# Altium PCB power.PcbDoc
Units mm, origin at the board's own origin, x right, y up, seen from the top; angles counter-clockwise.
Board outline 122.6 x 101.6 mm, 4 copper layers (Top Layer, Int1 (GND), Int2 (PWR), Bottom Layer), stack 1.369 mm thick; 55 components, 42 nets, 173 pads, 146 vias.
Unrouted connection lines stored in the file: 3.
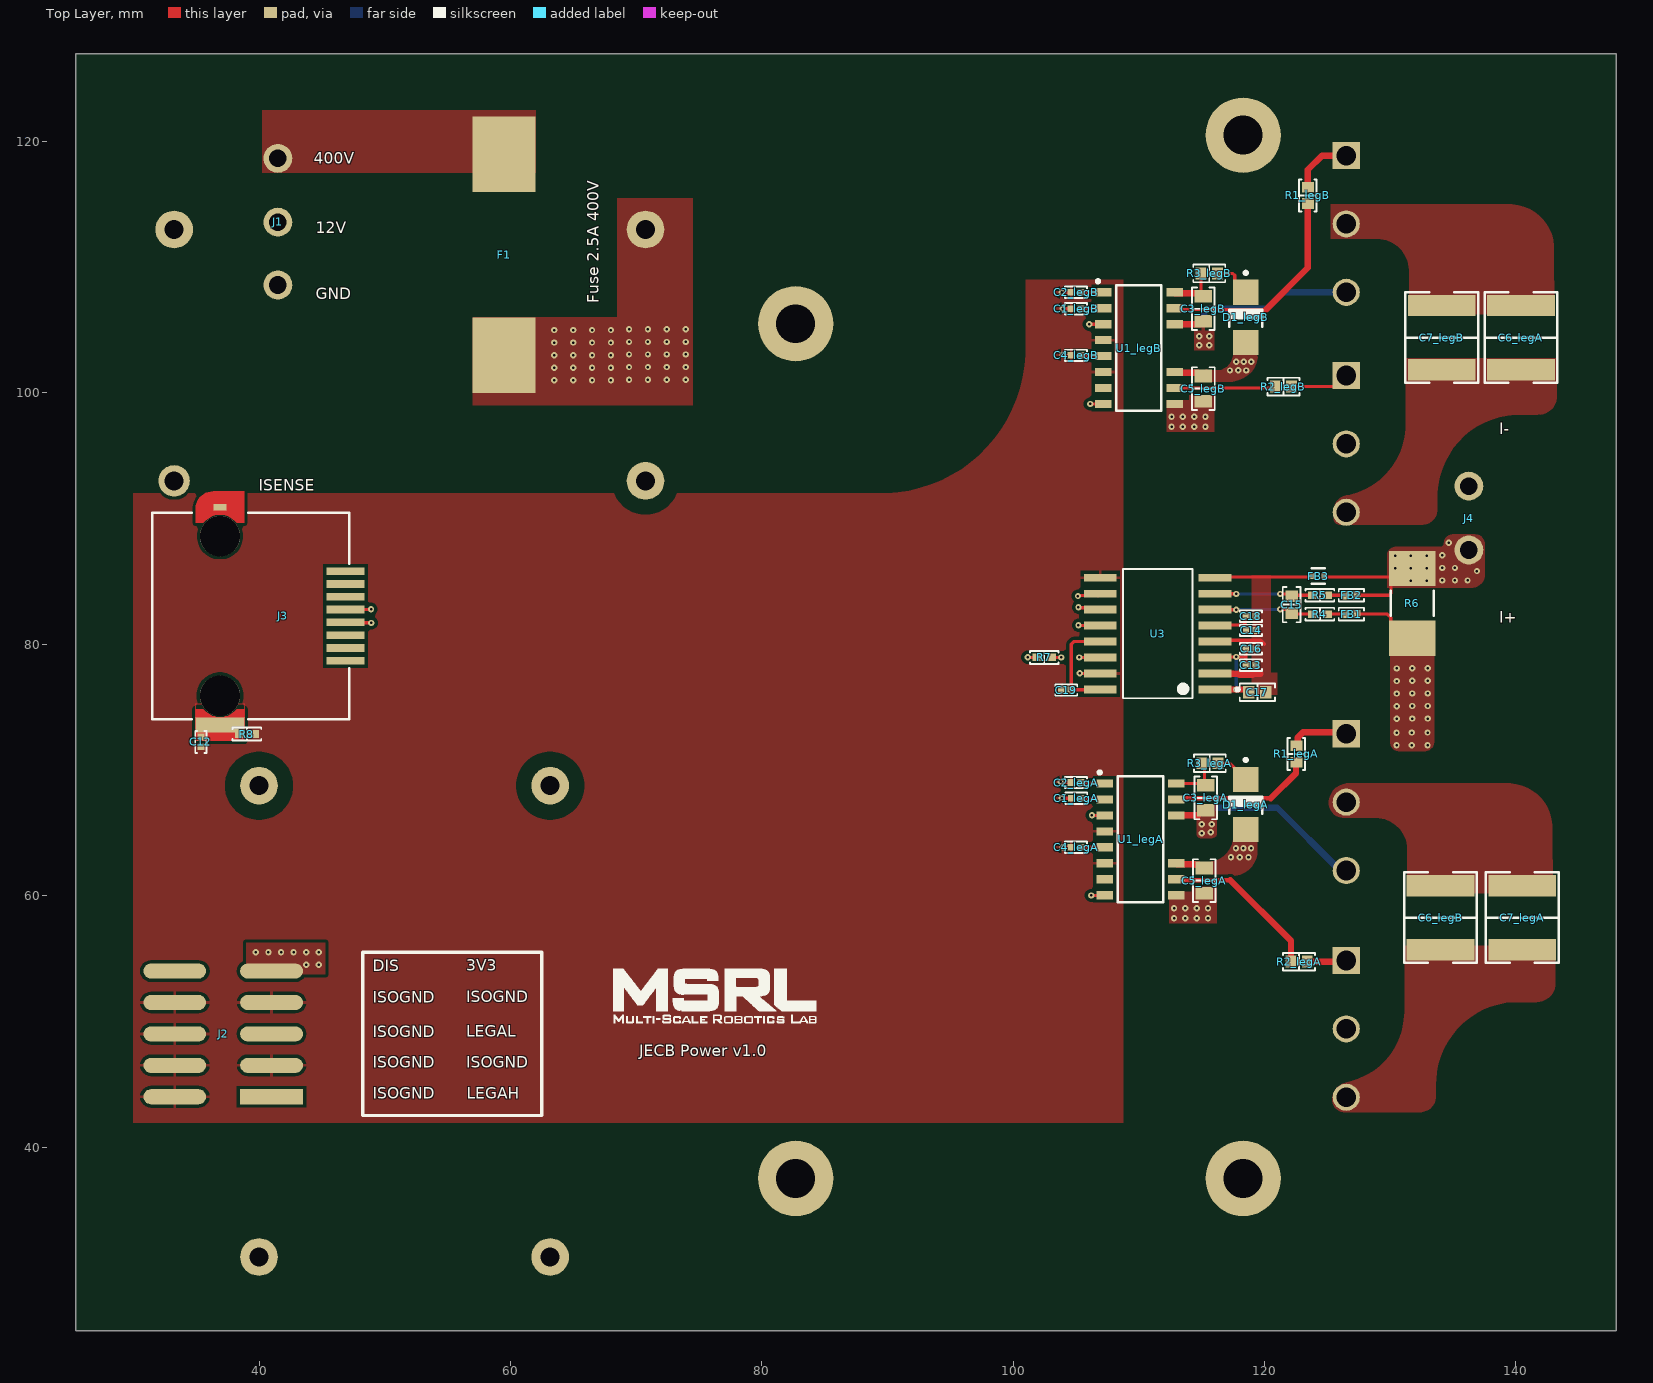
[diagram p0: Top Layer view]
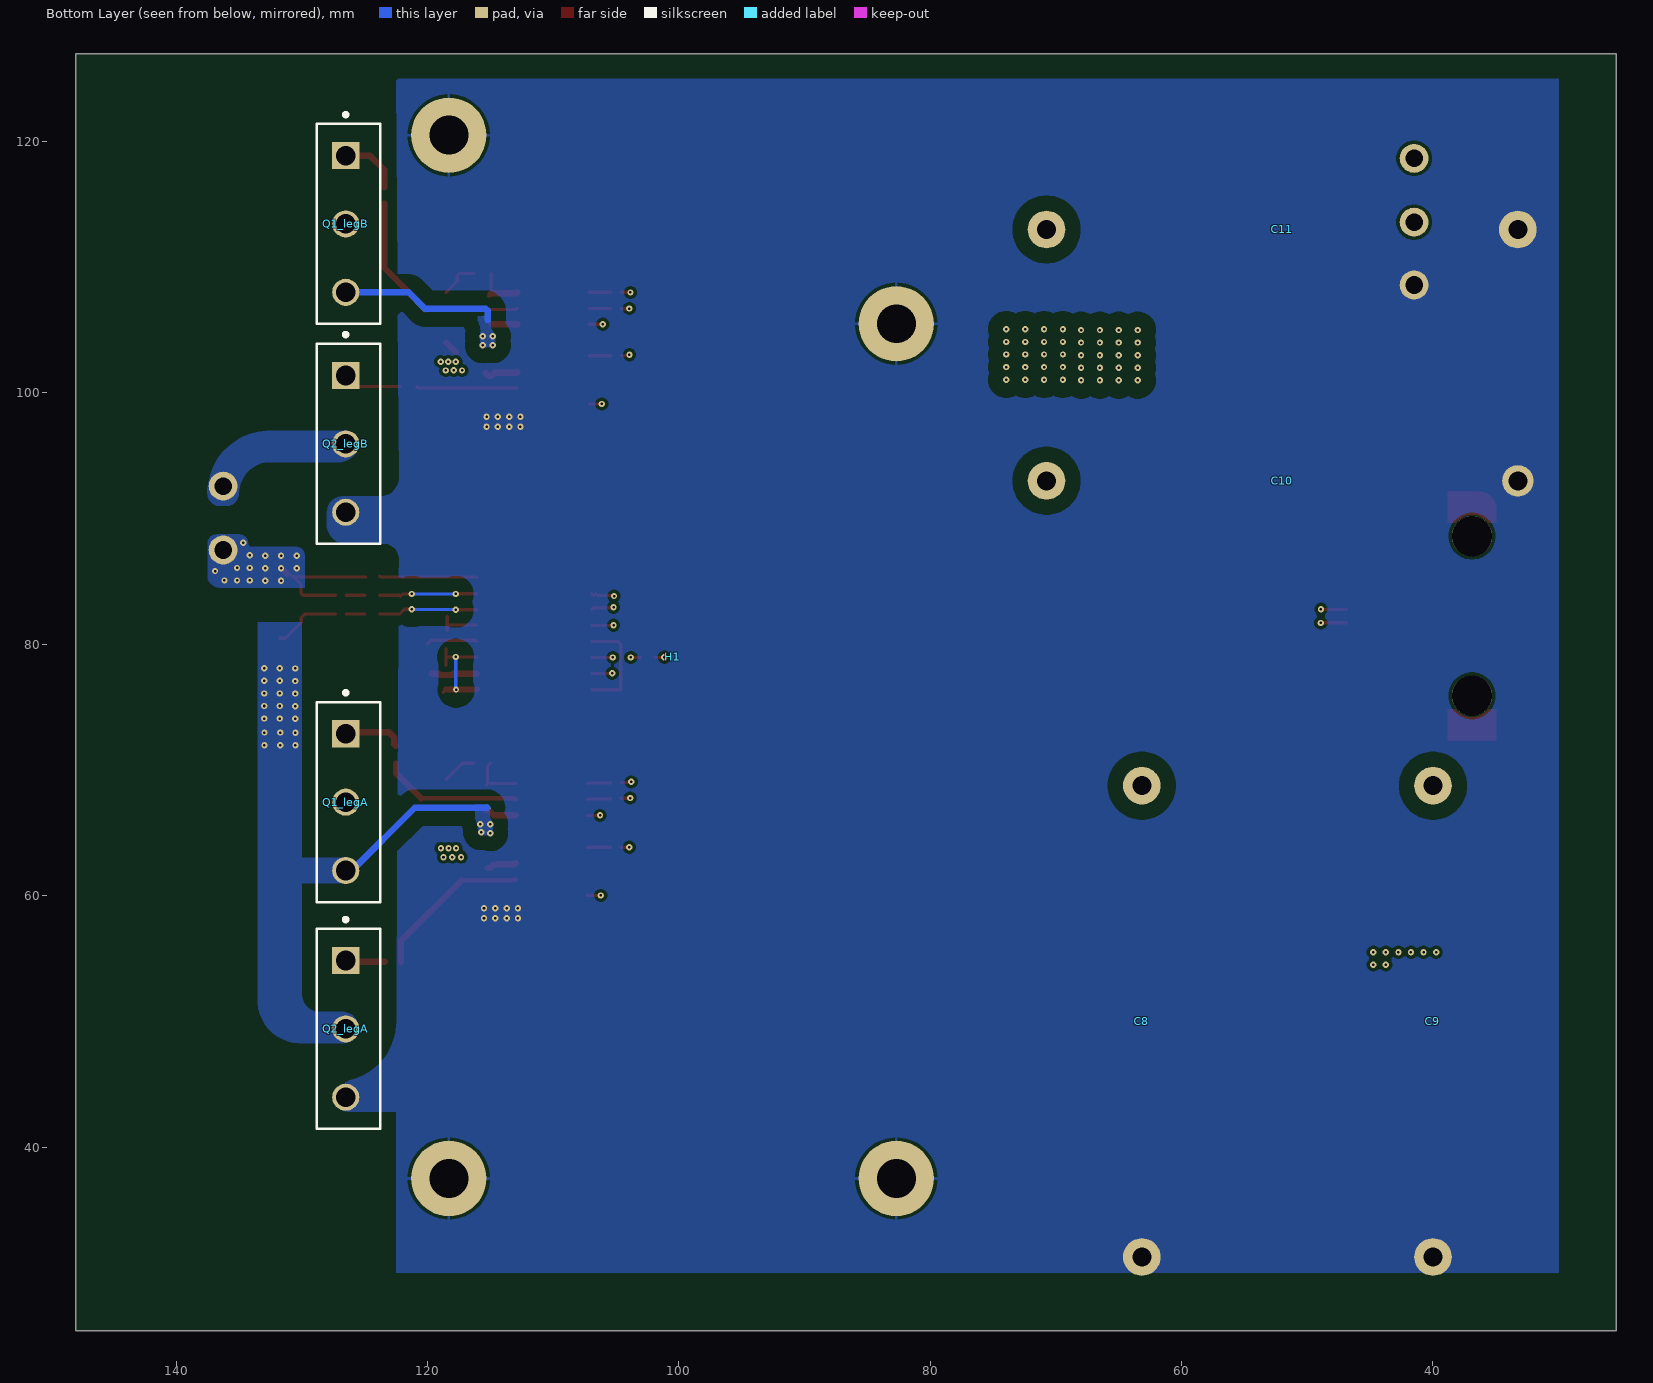
[diagram p1: Bottom Layer view, seen from below]
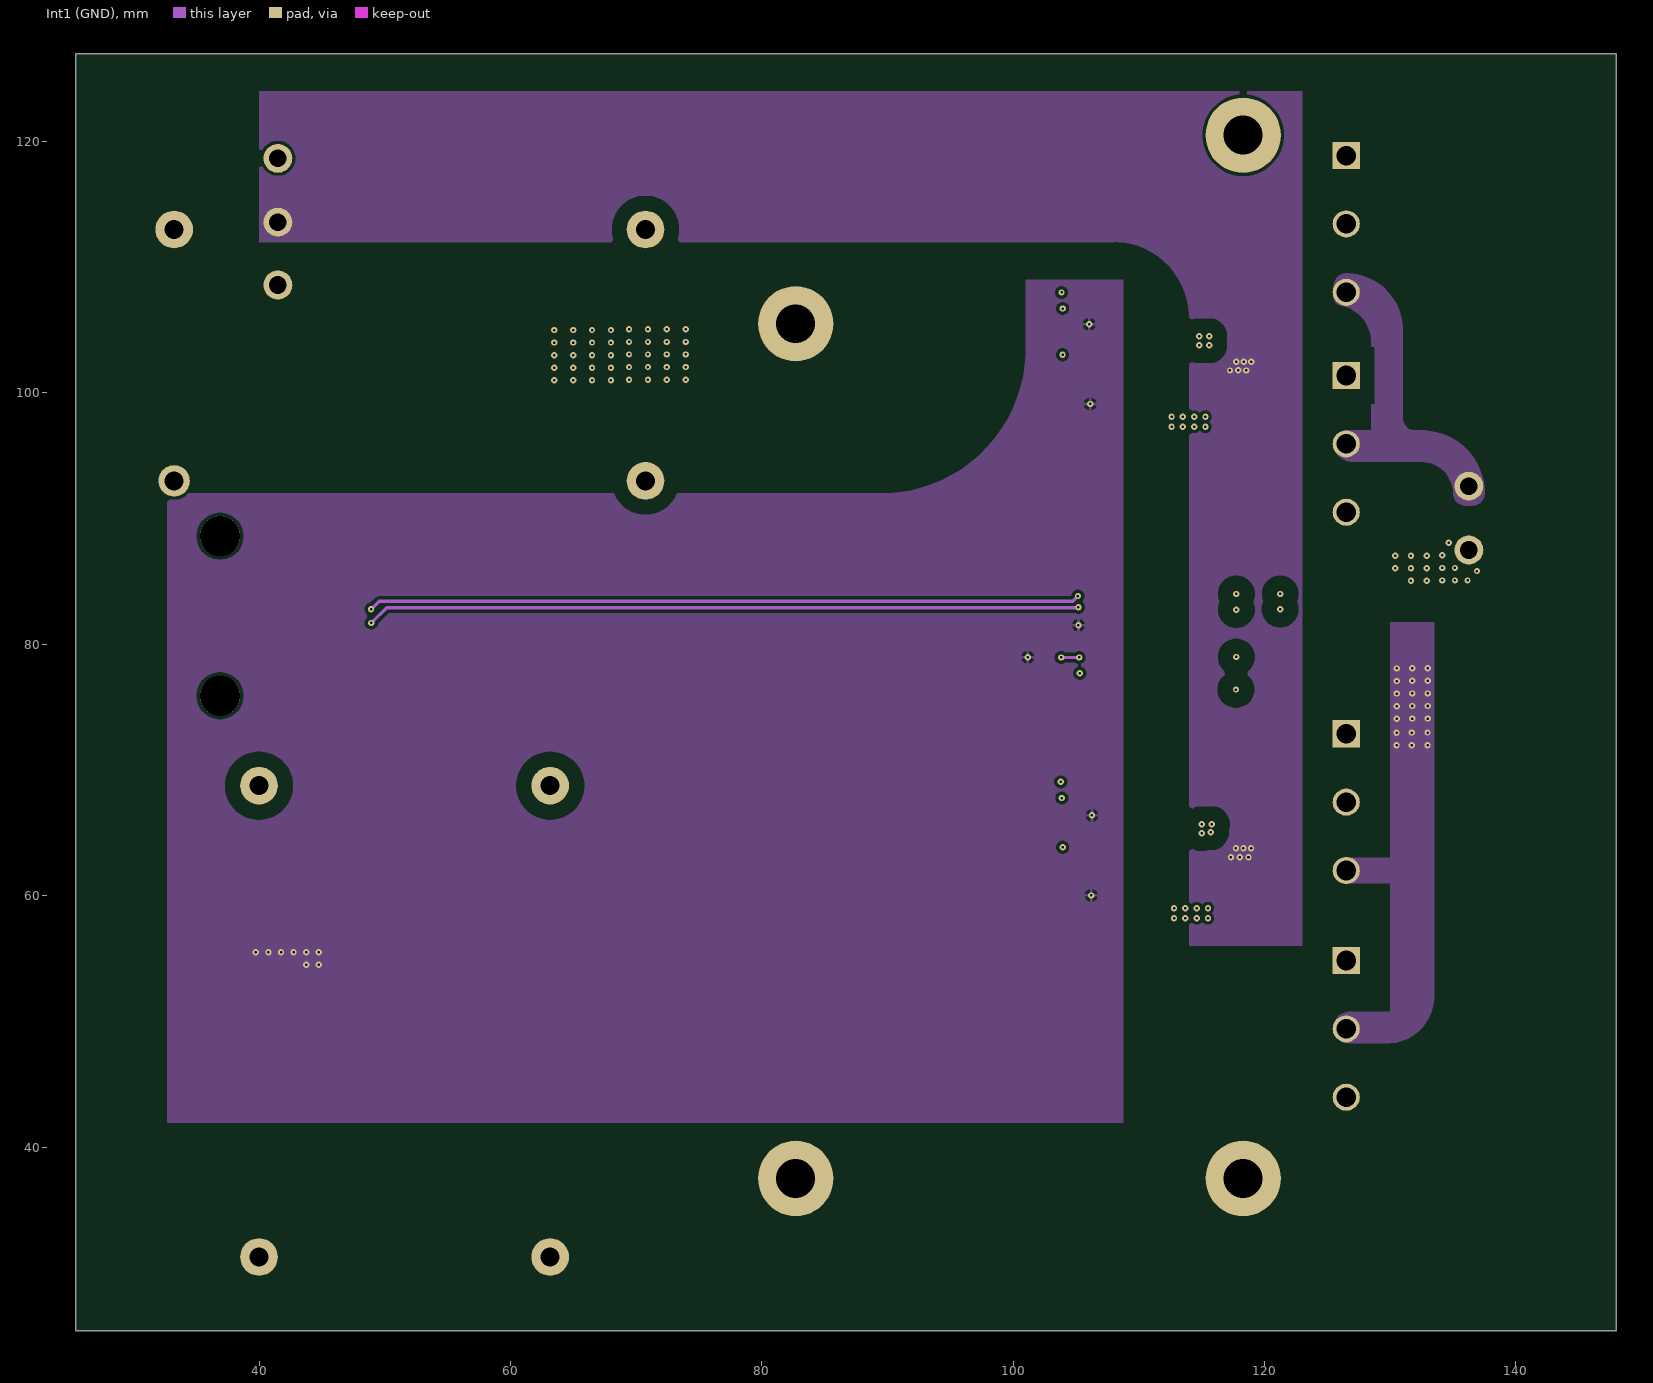
[diagram p2: Int1 (GND)]
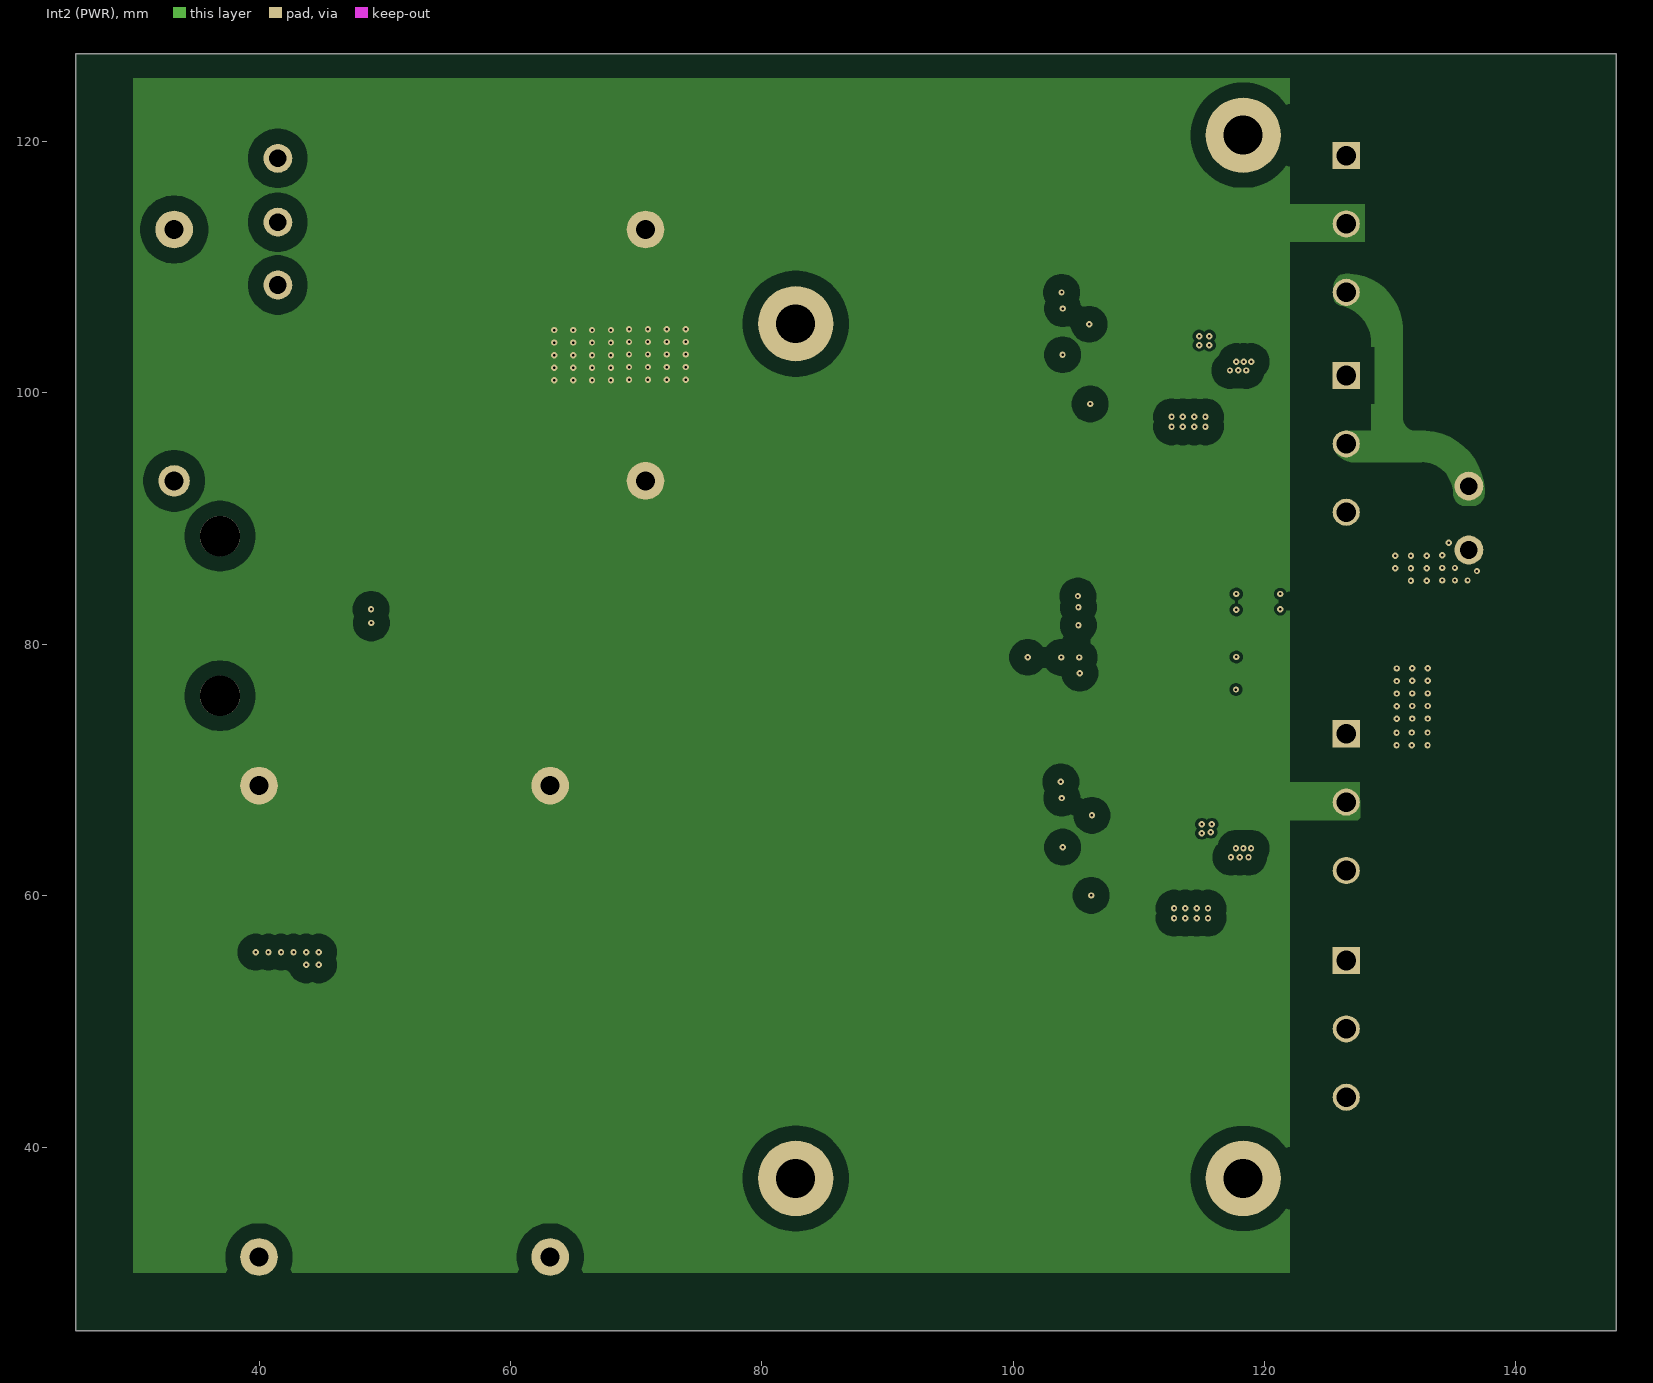
[diagram p3: Int2 (PWR)]

## Layer stack, top to bottom
Top Solder: solder mask 0.0254, SM-001, Dk 4
Top Layer: signal copper 0.035
Dielectric 1: prepreg 0.1295, PP-017, Dk 4.3
Dielectric 2: prepreg 0.1295, PP-017, Dk 4.3
Int1 (GND): signal copper 0.035
Dielectric 3: core 0.7112, Core-039, Dk 4.8
Int2 (PWR): signal copper 0.035
Dielectric 4: prepreg 0.1295, PP-017, Dk 4.3
Dielectric 5: prepreg 0.1295, PP-017, Dk 4.3
Bottom Layer: signal copper 0.035
Bottom Solder: solder mask 0.0254, SM-001, Dk 4

## Board outline
25.4,25.4 148,25.4 148,127 25.4,127

## Design rules (kind name [scope] priority, off if disabled: settings)
Clearance hv_clearance [InNetClass('VH') vs NOT InNetClass('VH')] p1: gap=1.2 ignorepadtopadclearanceinfootprint=FALSE
Clearance [All] p2: gap=0.254 ignorepadtopadclearanceinfootprint=FALSE
Height [All] p1: minheight=0 maxheight=50 prefheight=12.7
HoleSize [All] p1: absolutevalues=TRUE maxlimit=5 minlimit=0.025 maxpercent=80.000 minpercent=20.000
PolygonConnect [All] p1: connectstyle=Relief reliefconductorwidth=0.254 reliefentries=4 polygonreliefangle="90 Angle" airgapwidth=0.254
RoutingVias [All] p1: holewidth=0.711 width=1.27 viastyle="Through Hole" minholewidth=0.2 minwidth=0.5 maxholewidth=0.711 maxwidth=1.27
SilkToSolderMaskClearance [IsPad] p1: minsilkscreentomaskgap=0.025 clearancetoexposedcopper=TRUE
SolderMaskExpansion [All] p1: expansion=0.102 istentingtop=FALSE
Width [All] p1: maxlimit=1.27 minlimit=0.254 preferedwidth=0.254
27 further rules are at their usual default settings.

## Classes and differential pairs
net class VH: 200V NetC3_legA_1 NetC3_legA_2 NetC3_legB_1 NetC3_legB_2 NetC13_1 NetC13_2 NetC14_2 NetC15_1 NetC15_2 NetD1_legA_1 NetD1_legB_1 NetFB1_2 NetQ1_legA_1 NetQ1_legB_1 NetR1_legA_1 NetR1_legB_1
component class current_sense: C13 C14 C15 C16 C17 C18 C19 FB1 FB2 FB3 R4 R5 R6 R7 U3
channel class bridge_leg: legA legB
component class legB: C1_legB C2_legB C3_legB C4_legB C5_legB C6_legB C7_legB D1_legB Q1_legB Q2_legB R1_legB R2_legB R3_legB U1_legB
component class legA: C1_legA C2_legA C3_legA C4_legA C5_legA C6_legA C7_legA D1_legA Q1_legA Q2_legA R1_legA R2_legA R3_legA U1_legA
component class top: C8 C9 C10 C11 C12 F1 H1 J1 J2 J3 J4 R8

## Components (designator, comment, footprint, x,y, rotation, side; value= is the part's Value field where it differs from the comment)
C1_legA "100pF 0402" "CAP 0402_1005 RF" 105.015,67.743 r180 top (schematic designator C1)
C1_legB "100pF 0402" "CAP 0402_1005 RF" 105,106.692 r180 top (schematic designator C1)
C2_legA "100pF 0402" "CAP 0402_1005 RF" 105,69 r180 top (schematic designator C2)
C2_legB "100pF 0402" "CAP 0402_1005 RF" 105,108 r180 top (schematic designator C2)
C3_legA "1uF 0603" "CAP 0805_2012" 115.322,67.779 r270 top (schematic designator C3)
C3_legB "1uF 0603" "CAP 0805_2012" 115.131,106.692 r270 top (schematic designator C3)
C4_legA "100nF 0402" "CAP 0402_1005 RF" 105,63.847 r180 top (schematic designator C4)
C4_legB "100nF 0402" "CAP 0402_1005 RF" 105,102.985 r180 top (schematic designator C4)
C5_legA "1uF 0805" "CAP 0805_2012" 115.2,61.2 r270 top (schematic designator C5)
C5_legB "1uF 0805" "CAP 0805_2012" 115.134,100.341 r270 top (schematic designator C5)
C6_legA "1uF 630V" "CAP 2220_5650 2.5MM" 140.4,104.4 r90 top (schematic designator C6)
C6_legB "1uF 630V" "CAP 2220_5650 2.5MM" 134,58.25 r90 top (schematic designator C6)
C7_legA "1uF 630V" "CAP 2220_5650 2.5MM" 140.5,58.25 r90 top (schematic designator C7)
C7_legB "1uF 630V" "CAP 2220_5650 2.5MM" 134.1,104.4 r90 top (schematic designator C7)
C8 "25uF" film_cap_50uF#1 63.164,50 r180 bottom
C9 "25uF" film_cap_50uF#1 40,50 r180 bottom
C10 "25uF" film_cap_50uF#2 52,93 r90 bottom
C11 "25uF" film_cap_50uF#1 52,113 r90 bottom locked
C12 "100nF 0402" "CAP 0402_1005 RF" 35.376,72.236 r90 top
C13 "100nF 0402" "CAP 0402_1005 RF" 118.916,78.328 r180 top
C14 "100nF 0402" "CAP 0402_1005 RF" 118.934,81.102 r180 top
C15 "1uF 0603" "CAP 0603_1608" 122.15,83.15 r90 top
C16 "1nF 0402" "CAP 0402_1005 RF" 118.925,79.65 r180 top
C17 "1uF 0603" "CAP 0603_1608" 119.425,76.175 r0 top
C18 "1nF 0402" "CAP 0402_1005 RF" 118.916,82.225 r180 top
C19 "100nF 0402" "CAP 0402_1005 RF" 104.225,76.35 r0 top
D1_legA "MURA160T3G" ONSC-SMA-2-403D-02_V 118.5,67.25 r270 top (schematic designator D1)
D1_legB "MURA160T3G" ONSC-SMA-2-403D-02_V 118.5,106 r270 top (schematic designator D1)
F1 "10A / 250V" fuseholder_5mm_20mm 59.5,111 r270 top
FB1 "2.2Ohm DC" "FER 0402_1005" 126.9,82.4 r180 top
FB2 "2.2Ohm DC" "FER 0402_1005" 126.9,83.9 r0 top
FB3 "2Ohm DC" FP-BKH1005-MFG 124.272,85.426 r0 top
H1 "Heatsink" HEATSINK2 100.5,77.5 r0 bottom locked
J1 "20A straight" weidmuller_3p_20A 41.5,113.58 r270 top
J2 "10pin_header" header_10 41,44 r180 top
J3 "634008149821" 634008149821 39.373,82.25 r270 top
J4 "weidmuller_20A_2p_f" weidmuller_19A_2p_m 136.25,87.5 r90 top
Q1_legA "IPW60R024P7" INF-PG-TO247-3 126.5,67.44 r180 bottom (schematic designator Q1)
Q1_legB "IPW60R024P7" INF-PG-TO247-3 126.5,113.44 r180 bottom (schematic designator Q1)
Q2_legA "IPW60R024P7" INF-PG-TO247-3 126.5,49.4 r180 bottom (schematic designator Q2)
Q2_legB "IPW60R024P7" INF-PG-TO247-3 126.5,95.94 r180 bottom (schematic designator Q2)
R1_legA "3.3 0603" "RES 0603_1608" 122.528,71.272 r90 top value=3.3 (schematic designator R1)
R1_legB "3.3 0603" "RES 0603_1608" 123.447,115.713 r90 top value=3.3 (schematic designator R1)
R2_legA "3.3 0603" "RES 0603_1608" 122.75,54.75 r0 top value=3.3 (schematic designator R2)
R2_legB "3.3 0603" "RES 0603_1608" 121.5,100.5 r0 top value=3.3 (schematic designator R2)
R3_legA "10 0603" "RES 0603_1608" 115.642,70.533 r0 top value=10 (schematic designator R3)
R3_legB "10 0603" "RES 0603_1608" 115.6,109.5 r0 top value=10 (schematic designator R3)
R4 "10 0402" "RES 0402_1005" 124.4,82.4 r0 top value=10
R5 "10 0402" "RES 0402_1005" 124.4,83.9 r0 top value=10
R6 "3mOhm 2512 2W" FP-CSNL2512-MFG 131.75,83.25 r90 top value=3mΩ
R7 "47k 0402" "RES 0402_1005" 102.475,78.95 r0 top value=47k
R8 "1M 0402" "RES 0402_1005" 39.033,72.859 r0 top value=1Meg
U1_legA "2EDB8259Y" SOIC127P600X175-16_14N-1-V 110.131,64.48 r0 top (schematic designator U1)
U1_legB "2EDB8259Y" SOIC127P600X175-16_14N-1-V 109.993,103.558 r0 top (schematic designator U1)
U3 "PAMC3302DWER" DWE0016A-IPC_A 111.5,80.85 r180 top

## Footprints (in the part's own frame and the unit in brackets; to place one, negate y for a bottom-side part, rotate by r counter-clockwise, add the part's x,y. Pads: shape width x height; smd on the part's side, far side on the other; paste and mask are expansions set on the pad)
634008149821 [mm] "Modular Jack Horizontal Shielded SMT 8P8C Tab Up"
  rect 0.61x3.05 smd: 1(3.57,7.505) 2(2.55,7.505) 3(1.53,7.505) 4(0.51,7.505) 5(-0.51,7.505) 6(-1.53,7.505) 7(-2.55,7.505) 8(-3.57,7.505)
  round 3.2 hole 3.2 unplated: M1(-6.35,-2.475) M2(6.35,-2.475)
  rect 0.5x1 smd paste-403.566 mask-403.566: Shell(-8.66,-2.475)
  rect 1.2x3.89 smd paste-403.566 mask-403.566: Shell(8.66,-2.475)
  Top Layer region: -8.521,-4.42 -7.41,-4.42 -7.41,-3.807 -7.883,-3.214 -8.052,-2.475 -7.883,-1.736 -7.41,-1.143 -7.41,-1.143 -7.41,-0.53 -9.91,-0.53 -9.91,-3.031 -9.724,-3.725 -9.215,-4.234 -8.521,-4.42
  Top Layer region: 9.91,-4.42 7.41,-4.42 7.41,-3.807 7.883,-3.214 8.052,-2.475 7.883,-1.736 7.41,-1.143 7.41,-1.143 7.41,-0.53 9.91,-0.53
  silkscreen extent -8.2,-7.87 8.2,7.83, body extent -9.4,-7.87 9.4,8.42, height 13.45
"CAP 0402_1005 RF" [mm] "Chip Capacitor, 2-Leads, Body 1.02x0.51mm, IPC High Density"
  rect 0.55x0.54 smd: 1(-0.39,0) 2(0.39,0)
  silkscreen extent -0.87,-0.45 0.88,0.45, body extent -0.5,-0.26 0.5,0.26, height 0.52
"CAP 0603_1608" [mm] "Chip Capacitor, 2-Leads, Body 1.60x0.80mm, IPC Medium Density"
  rect 0.9x1 smd: 1(-0.675,0) 2(0.675,0)
  silkscreen extent -1.4,-0.7 1.4,0.7, body extent -0.8,-0.41 0.8,0.41, height 0.82
"CAP 0805_2012" [mm] "Chip Capacitor, 2-Leads, Body 2.00x1.20mm, IPC Medium Density"
  rect 1x1.4 smd: 1(-1,0) 2(1,0)
  silkscreen extent -1.7,-0.9 1.7,0.9, body extent -1,-0.64 1,0.64, height 1.26
"CAP 2220_5650 2.5MM" [mm] "Chip Capacitor, 2-Leads, Body 5.70x5.00mm, IPC Medium Density"
  rect 1.7x5.4 smd: 1(-2.55,0) 2(2.55,0)
  silkscreen extent -3.6,-2.9 3.6,2.9, body extent -2.85,-2.5 2.85,2.5, height 2.5
DWE0016A-IPC_A [mm]
  rect 2.603x0.622 smd paste+0 mask+0: 1(-4.565,4.445) 2(-4.565,3.175) 3(-4.565,1.905) 4(-4.565,0.635) 5(-4.565,-0.635) 6(-4.565,-1.905) 7(-4.565,-3.175) 8(-4.565,-4.445) 9(4.565,-4.445) 10(4.565,-3.175) 11(4.565,-1.905) 12(4.565,-0.635) 13(4.565,0.635) 14(4.565,1.905) 15(4.565,3.175) 16(4.565,4.445)
  silkscreen extent -6.49,-5.15 2.76,5.15, body extent -3.68,-5.08 3.68,5.08, height 2
"FER 0402_1005" [mm] "Chip Ferrite, 2-Leads, Body 1.02x0.51mm, IPC Medium Density"
  rect 0.6x0.64 smd: 1(-0.44,0) 2(0.44,0)
  silkscreen extent -1,-0.5 1,0.5, body extent -0.5,-0.26 0.5,0.26, height 0.52
film_cap_50uF#1 [mm]
  round 3 hole 1.5: 1(0,18.75) 2(0,-18.75)
  body extent -9.5,-21 9.5,21, height 32.82
film_cap_50uF#2 [mm]
  round 3 hole 1.5: 1(0,18.75)
  round 2.5 hole 1.5: 2(0,-18.75)
  body extent -9.5,-21 9.5,21, height 32.82
FP-BKH1005-MFG [mm]
  rect 0.45x0.5 smd paste+0 mask+0: 1(-0.475,0) 2(0.475,0)
  silkscreen extent -0.53,-0.63 0.52,0.63, body extent -0.8,-0.38 0.8,0.38, height 0.25
FP-CSNL2512-MFG [mm]
  rect 2.8x3.7 smd paste+0 mask+0: 1(-2.775,0) 2(2.775,0)
  silkscreen extent -1,-1.72 1,1.72, body extent -4.28,-1.95 4.28,1.95, height 0.25
fuseholder_5mm_20mm [mm]
  rect 6x5 smd: 1(8,0) 2(-8,0)
  body extent -11.25,-4.8 11.45,4.8, height 12
header_10 [mm]
  rect 5x1.2 smd: 1(0,0)
  oval 5x1.2 smd: 2(0,-2.5) 3(0,-5) 4(0,-7.5) 5(0,-10) 6(7.7,-10) 7(7.7,-7.5) 8(7.7,-5) 9(7.7,-2.5) 10(7.7,0)
  body extent -1.6,-21 9.4,11, height 29.62
HEATSINK2 [mm]
  round 6 hole 3.1: 1(-17.8,-28) 1(-17.8,40) 1(17.8,-43) 1(17.8,40)
  body extent -23,-45 23,45, height 33
INF-PG-TO247-3 [mm] "TO-247-3,5.44mm pitch;3 pin,15.915mm L X 5.02mm W X 25.57mm H body"
  rect 2.16x2.16 hole 1.56 paste-2539.97 mask+0: 1(0,5.44)
  round 2.16 hole 1.56 paste-2539.97 mask+0: 2(0,0) 3(0,-5.44)
  silkscreen extent -2.29,-7.96 2.74,8.85, body extent -2.38,-7.96 2.84,7.96, height 25.23
ONSC-SMA-2-403D-02_V [mm] "Molded, 2-Leads, Body 4.57x2.92mm"
  rect 2x2 smd: 1(-2,0) 2(2,0)
  silkscreen extent -3.67,-1.3 0.74,1.3, body extent -2.16,-1.3 2.16,1.3, height 2.2
"RES 0402_1005" [mm] "Chip Resistor, 2-Leads, Body 1.0x0.5mm, IPC Medium Density"
  rect 0.75x0.6 smd: 1(-0.575,0) 2(0.575,0)
  silkscreen extent -1.14,-0.51 1.14,0.51, body extent -0.5,-0.25 0.5,0.25, height 0.35
"RES 0603_1608" [mm] "Chip Resistor, 2-Leads, Body 1.60x0.80mm, IPC Medium Density"
  rect 0.85x0.95 smd: 1(-0.65,0) 2(0.65,0)
  silkscreen extent -1.27,-0.7 1.27,0.7, body extent -0.8,-0.4 0.8,0.4, height 0.45
SOIC127P600X175-16_14N-1-V [mm] "SOIC,1.27mm,pitch;14 pin,3.90mm W X 9.90mm L X 1.75mm H body"
  rect 1.31x0.65 smd paste+0 mask+0: 1(-2.845,4.445) 2(-2.845,3.175) 3(-2.845,1.905) 4(-2.845,0.635) 5(-2.845,-0.635) 6(-2.845,-1.905) 7(-2.845,-3.175) 8(-2.845,-4.445) 9(2.845,-4.445) 10(2.845,-3.175) 11(2.845,-1.905) 12(2.845,1.905) 13(2.845,3.175) 14(2.845,4.445)
  silkscreen extent -3.37,-5 1.8,5.44, body extent -3,-4.95 3,4.95, height 1.76
weidmuller_3p_20A [mm]
  round 2.3 hole 1.4: 1(5,0) 2(0,0) 3(-5.08,0)
  body extent -7.52,-10 7.52,2, height 9.63
weidmuller_19A_2p_m [mm]
  round 2.3 hole 1.4: 1(0,0) 2(5.08,0)
  body extent -3.4,-9.94 8.52,2.06, height 9.63

## Part data
C1_legA C1_legB C2_legA C2_legB C8 C9 C10 C11: library part b4654b650e69147ec39a6b967a45e02, "MLCC 0402 100pF", Capacitance=100pF, Case Code (Imperial)=0402, Case Code (Metric)=1005, Dielectric=C0G, Insulation Resistance=1GR, Max Operating Temperature=125°C, Min Operating Temperature=-55°C, Package Quantity=1, Temperature Coefficient=30ppm/°C, Tolerance=5%, Voltage=50V, Case/Package=0402, Construction=Flat, Contact Plating=Tin, Depth=0.5mm, Dissipation Factor=2.5%, Height=0.56mm, Lead Free="Lead Free", Length=1mm, Mount="Surface Mount", Packaging="Tape and Reel", Radiation Hardening=No, REACH SVHC="No SVHC", RoHS Compliant=Yes, Series=-, Termination=SMD/SMT, Thickness=0.022inch, Voltage Rating=50V, Voltage Rating (DC)=50V, Width=0.02inch
C3_legA C3_legB C5_legA C5_legB: library part b4654b650e69147ec39a6b967a45e02, "MLCC 0805 1uF", Capacitance=1uF, Case Code (Imperial)=0402, Case Code (Metric)=1005, Dielectric=C0G, Insulation Resistance=1GR, Max Operating Temperature=125°C, Min Operating Temperature=-55°C, Package Quantity=1, Supplier Part Number 1=80-C0603C105K3R, Temperature Coefficient=30ppm/°C, Tolerance=5%, Voltage=50V, Case/Package=0402, Construction=Flat, Contact Plating=Tin, Depth=0.5mm, Dissipation Factor=2.5%, Height=0.56mm, Lead Free="Lead Free", Length=1mm, Mount="Surface Mount", Packaging="Tape and Reel", Radiation Hardening=No, REACH SVHC="No SVHC", RoHS Compliant=Yes, Series=-, Supplier 1=Mouser, Termination=SMD/SMT, Thickness=0.022inch, Voltage Rating=50V, Voltage Rating (DC)=50V, Width=0.02inch
C4_legA C4_legB: library part b4654b650e69147ec39a6b967a45e02, "MLCC 0402 100pF", Capacitance=100pF, Case Code (Imperial)=0402, Case Code (Metric)=1005, Dielectric=C0G, Insulation Resistance=1GR, Max Operating Temperature=125°C, Min Operating Temperature=-55°C, Package Quantity=1, Supplier Part Number 1=5964861, Temperature Coefficient=30ppm/°C, Tolerance=5%, Voltage=50V, Case/Package=0402, Construction=Flat, Contact Plating=Tin, Depth=0.5mm, Dissipation Factor=2.5%, Height=0.56mm, Lead Free="Lead Free", Length=1mm, Mount="Surface Mount", Packaging="Tape and Reel", Radiation Hardening=No, REACH SVHC="No SVHC", RoHS Compliant=Yes, Series=-, Supplier 1="Future Electronics", Termination=SMD/SMT, Thickness=0.022inch, Voltage Rating=50V, Voltage Rating (DC)=50V, Width=0.02inch
C6_legA C6_legB C7_legA C7_legB: library part Capacitor_Non-Polarized, "MLCC 1Uf, 630V, Mlcc, 2220 Rohs Compliant: Yes", Capacitance=1µF, Insulation Resistance=100MΩ, Max Operating Temperature=125°C, Min Operating Temperature=-55°C, Voltage Rating=630V, Height=5mm, Length=5.7mm, NexarPartId=133607636, RoHS=Compliant, Width=2.8mm
C12 C13 C14 C19: library part b4654b650e69147ec39a6b967a45e02, "MLCC 0402 100nF", Capacitance=100nF, Case Code (Imperial)=0402, Case Code (Metric)=1005, Dielectric=C0G, Insulation Resistance=1GR, Max Operating Temperature=125°C, Min Operating Temperature=-55°C, Package Quantity=1, Supplier Part Number 1=5964861, Temperature Coefficient=30ppm/°C, Tolerance=5%, Voltage=50V, Case/Package=0402, Construction=Flat, Contact Plating=Tin, Depth=0.5mm, Dissipation Factor=2.5%, Height=0.56mm, Lead Free="Lead Free", Length=1mm, Mount="Surface Mount", Packaging="Tape and Reel", Radiation Hardening=No, REACH SVHC="No SVHC", RoHS Compliant=Yes, Series=-, Supplier 1="Future Electronics", Termination=SMD/SMT, Thickness=0.022inch, Voltage Rating=50V, Voltage Rating (DC)=50V, Width=0.02inch
C15: library part b4654b650e69147ec39a6b967a45e02, "MLCC 0402 100pF", Capacitance=1uF, Case Code (Imperial)=0402, Case Code (Metric)=1005, Dielectric=C0G, Insulation Resistance=1GR, Max Operating Temperature=125°C, Min Operating Temperature=-55°C, Package Quantity=1, Temperature Coefficient=30ppm/°C, Tolerance=5%, Voltage=50V, Case/Package=0402, Construction=Flat, Contact Plating=Tin, Depth=0.5mm, Dissipation Factor=2.5%, Height=0.56mm, Lead Free="Lead Free", Length=1mm, Mount="Surface Mount", Packaging="Tape and Reel", Radiation Hardening=No, REACH SVHC="No SVHC", RoHS Compliant=Yes, Series=-, Termination=SMD/SMT, Thickness=0.022inch, Voltage Rating=50V, Voltage Rating (DC)=50V, Width=0.02inch
C16 C18: library part b4654b650e69147ec39a6b967a45e02, "MLCC 0402 1nF", Capacitance=1nF, Case Code (Imperial)=0402, Case Code (Metric)=1005, Dielectric=C0G, Insulation Resistance=1GR, Max Operating Temperature=125°C, Min Operating Temperature=-55°C, Package Quantity=1, Supplier Part Number 1=7077183, Temperature Coefficient=30ppm/°C, Tolerance=5%, Voltage=50V, Case/Package=0402, Construction=Flat, Contact Plating=Tin, Depth=0.5mm, Dissipation Factor=2.5%, Height=0.56mm, Lead Free="Lead Free", Length=1mm, Mount="Surface Mount", Packaging="Tape and Reel", Radiation Hardening=No, REACH SVHC="No SVHC", RoHS Compliant=Yes, Series=-, Supplier 1="Future Electronics", Termination=SMD/SMT, Thickness=0.022inch, Voltage Rating=50V, Voltage Rating (DC)=50V, Width=0.02inch
C17: library part b4654b650e69147ec39a6b967a45e02, "MLCC 0603 1uF", Capacitance=1uF, Case Code (Imperial)=0402, Case Code (Metric)=1005, Dielectric=C0G, Insulation Resistance=1GR, Max Operating Temperature=125°C, Min Operating Temperature=-55°C, Package Quantity=1, Supplier Part Number 1=80-C0603C105K3R, Temperature Coefficient=30ppm/°C, Tolerance=5%, Voltage=50V, Case/Package=0402, Construction=Flat, Contact Plating=Tin, Depth=0.5mm, Dissipation Factor=2.5%, Height=0.56mm, Lead Free="Lead Free", Length=1mm, Mount="Surface Mount", Packaging="Tape and Reel", Radiation Hardening=No, REACH SVHC="No SVHC", RoHS Compliant=Yes, Series=-, Supplier 1=Mouser, Termination=SMD/SMT, Thickness=0.022inch, Voltage Rating=50V, Voltage Rating (DC)=50V, Width=0.02inch
D1_legA D1_legB: library part CMP-0894-00005-3, "Surface Mount Ultrafast Power Rectifier, 2-Pin SMA, Pb-Free, Tape and Reel", Manufacturer="On Semiconductor", ComponentLink1Description="Manufacturer URL", ComponentLink1URL=http://www.onsemi.com/, ComponentLink2Description=Datasheet, ComponentLink2URL=http://www.onsemi.cn/pub_link/Collateral/MURA160T3-D.PDF, ComponentLink3Description="Package Specification", ComponentLink3URL=http://www.onsemi.com/pub_link/Collateral/403D-02.PDF, DatasheetVersion="Rev. 6", IFSM Max (A)=30, Mounting Technology="Surface Mount", PackageDescription="2-Pin Small Molded Package, J-Bend Lead, Body 2.605 x 4.315 mm", PackageReference=SMA-2-403D-02, PackageVersion="Rev. G, 07/2012", Packing="Tape and Reel", PartNumber=MURA160T3G, RoHS=TRUE, Type=Ultrafast, VRRM Max (V)=600
F1: library part fuse, "Fuse Holder 5mm/20mm", Supplier Part Number 1=2693785, Supplier 1=Rs
FB1 FB2: library part 5f30dd21d616792df468990f7003faa, "Chip Ferrite Bead, 0402, 1800Ω @ 100MHz, 2.2Ω, 25%, 200mA", Case/Package=0402, DC Resistance (DCR)=2.2R, Max Current Rating=200mA, Max Operating Temperature=125°C, Min Operating Temperature=-55°C, Package Quantity=10000, Ratings=AEC-Q200, Supplier Part Number 1=332378, Height=0.022inch, Impedance=1.8kR, Length=0.039inch, Mount="Surface Mount", Number of Circuits=1, Number of Lines=1, Packaging="Tape and Reel", RoHS Compliant=Yes, Supplier 1=Rs, Width=0.02inch
FB3: library part CMP-14488-000017-2, "1.8 kOhms @ 100 MHz 1 Ferrite Bead 0402 (1005 Metric) 200mA 2Ohm", Case Code (Imperial)=0402, Case Code (Metric)=1005, DC Resistance (DCR)=2R, Max Current Rating=200mA, Max Operating Temperature=125°C, Min Operating Temperature=-55°C, Package Quantity=1, Test Frequency=100MHz, Tolerance=25%, Case/Package=0402, Depth=0.55mm, Halogen Free="Halogen Free", Height=0.022inch, Impedance=1.8kR, Lead Free="Lead Free", Length=0.039inch, Max DC Current=200mA, Mount="Surface Mount", Number of Lines=1, Packaging="Tape and Reel", RoHS Compliant=Yes, Series=BK, Termination=SMD/SMT, Width=0.02inch
H1: library part heatsink_2, "HEATSINK TO247 W/CLIP 75MM", Supplier Part Number 1=567-694-75, Supplier 1=Mouser
J1: library part wuerth_connector_straight_30_20A_691311500103, Supplier Part Number 1=732-2059-ND, Supplier 1=Digi-Key
J2: "Pin header male 2x5 2.54mm", Supplier Part Number 1=1175-1754-ND, Supplier 1=Digikey
J3: library part CMP-1502-01719-2, Contact Resistance=20mΩ, Current Rating=1.5A, Housing Color=Black, Insulation Resistance=500MΩ, Max Operating Temperature=85°C, Min Operating Temperature=-40°C, Operating Supply Voltage=120V, Contact Plating=Gold, Direction=Up, Housing Material=Nylon, Mount="Surface Mount", NexarPartId=52676018, Number of Ports=1, Number of Rows=1, RoHS=Compliant, Shielding=Shielded, Termination=Solder
J4: "Connector Block 19A Male Receptor", Supplier Part Number 1=281-4354-ND, Supplier 1=Digi-Key
Q1_legA Q1_legB Q2_legA Q2_legB: "Smart Low Side Power Switch", Manufacturer="Infineon Technologies", Supplier Part Number 1=726-IPW60R024P7XKSA1, Manufacturer Order Number=IPW60R024P7, PackageReference=PG-TO247-3-41, Supplier 1=Mouser
R1_legA R1_legB R2_legA R2_legB: library part Res1, "Resistor 3.3Ohm 0603", LatestRevisionDate=17-Jul-2002, LatestRevisionNote="Re-released for DXP Platform.", PackageDescription="Axial Device, Thru-Hole; 2 Leads; 0.3 in Pin Spacing", PackageReference=AXIAL-0.3, Published=8-Jun-2000, Publisher="Altium Limited"
R3_legA R3_legB R4 R5: library part Res1, "Resistor 10Ohm 0603", LatestRevisionDate=17-Jul-2002, LatestRevisionNote="Re-released for DXP Platform.", PackageDescription="Axial Device, Thru-Hole; 2 Leads; 0.3 in Pin Spacing", PackageReference=AXIAL-0.3, Published=8-Jun-2000, Publisher="Altium Limited"
R6: library part CMP-26527-000012-1, "RES 0.003 OHM 1% 2W 2512", 3DS Part Number=110-00007, Manufacturer=Stackpole, Manufacturer Part Number=CSNL2512FT3L00, Package=CSNL2512, Power Rating=2W, Resistance=3mΩ, Temperature="-55°C to +170°C", Temperature Coefficient=50ppm/°C, Temperature Range High=+170°C, Temperature Range Low=-55°C, Tolerance=1%, Automotive=No, Category=Res, ComponentLink2Description=Datasheet, ComponentLink2URL=https://www.seielect.com/Catalog/SEI-csnl.pdf, Composition="Metal Foil", Device Class L1="Passive Components", Device Class L2=Resistors, Device Class L3="Chip SMD Resistors", Digikey Description="RES 0.003 OHM 1% 2W 2512", Footprint Url=http://www.seielect.com/catalog/SEI-Std_Solder_Land_Patterns.pdf, Height=0.75mm, Ipc Land Pattern Name=RESC635318X55, Lead Free=Yes, Octopart=https://octopart.com/csnl2512ft3l00-stackpole+electronics-19206420, RoHS=TRUE, Series=CSNL
R7: library part Res1, "Resistor 10Ohm 0603", Supplier Part Number 1=71-CRCW0402-47K-E3, LatestRevisionDate=17-Jul-2002, LatestRevisionNote="Re-released for DXP Platform.", PackageDescription="Axial Device, Thru-Hole; 2 Leads; 0.3 in Pin Spacing", PackageReference=AXIAL-0.3, Published=8-Jun-2000, Publisher="Altium Limited", Supplier 1=Mouser
R8: library part Res1, "Resistor 10MOhm 0603", Supplier Part Number 1=279-CRGP0402F1M0, LatestRevisionDate=17-Jul-2002, LatestRevisionNote="Re-released for DXP Platform.", PackageDescription="Axial Device, Thru-Hole; 2 Leads; 0.3 in Pin Spacing", PackageReference=AXIAL-0.3, Published=8-Jun-2000, Publisher="Altium Limited", Supplier 1=Mouser
U1_legA U1_legB: "Dual-Channel Isolated Gate Driver", Manufacturer="Infineon Technologies", Supplier Part Number 1=726-2EDB8259YXUMA1, Manufacturer Order Number=2EDB8259Y, PackageReference=PG-DSO-14, Supplier 1=Mouser
U3: "Â±50-mV input, precision reinforced isolated amplifier with integrated DC/DC converter 16-SOIC -40 to 125", Manufacturer_Name="Texas Instruments", Copyright="Copyright (C) 2025 Ultra Librarian. All rights reserved.", Datasheet=https://www.ti.com/lit/gpn/amc3302, Manufacturer_Part_Number=PAMC3302DWER, RefDes=RefDes, Type=TYPE

## Via types
v1: diameter 0.5, hole 0.2, Top Layer to Bottom Layer, 106 vias
v2: diameter 0.5, hole 0.2, Top Layer to Bottom Layer, tented both sides, 40 vias

## Nets (pads, with @x,y where several pads share a name; then routed paths per layer and width w, separated by ;. In a path a pad name is that pad's centre, name@x,y a point inside that pad or via, vN(x,y) a via of type N, cw(c..) or ccw(c..) an arc to the next point about the centre after c; other vN are vias at no path point)
12V: C5_legA.1 C5_legB.1 D1_legA.2 D1_legB.2 J1.2 U1_legA.11 U1_legB.11 | length 6.2
  Top Layer w0.508: U1_legB.11 112.901,101.59 114.684,101.59 114.934,101.341 C5_legB.1 C5_legB.1@115.38,101.587 ; U1_legA.11 113.047,62.504 113.668,62.504 113.673,62.499 114.456,62.499 114.509,62.446 114.754,62.446 115,62.2 C5_legA.1 ; D1_legB.2@117.754,103.254 D1_legB.2
  other v1: 117.323,63.063 118.023,63.063 118.723,63.063 117.723,63.763 118.323,63.763 118.923,63.763 117.242,101.786 118.542,101.786 117.9,101.8 117.742,102.486 118.342,102.486 118.942,102.486
200V: C6_legA.2 C6_legB.2 C7_legA.2 C7_legB.2 C8.1 C9.1 C10.1 C11.1 F1.1 Q1_legA.2 Q1_legB.2
  other v2: 63.5,101 65,101 66.5,101 68,101 69.444,101.054 70.944,101.054 72.444,101.054 73.944,101.054 63.5,102 65,102 66.5,102 68,102 69.444,102.054 70.944,102.054 72.444,102.054 73.944,102.054 63.5,103 65,103 66.5,103 68,103 69.444,103.054 70.944,103.054 72.444,103.054 73.944,103.054 63.5,104 65,104 66.5,104 68,104 69.444,104.054 70.944,104.054 72.444,104.054 73.944,104.054 63.5,105 65,105 66.5,105 68,105 69.444,105.054 70.944,105.054 72.444,105.054 73.944,105.054
DIS: J2.6
GND: C5_legA.2 C5_legB.2 C6_legA.1 C6_legB.1 C7_legA.1 C7_legB.1 C8.2 C9.2 C10.2 C11.2 H1.1 J1.1 Q2_legA.3 Q2_legB.3 U1_legA.9 U1_legB.9
  other v1: 112.8,58.2 113.7,58.2 114.6,58.2 115.5,58.2 112.8,59 113.7,59 114.6,59 115.5,59 112.6,97.3 113.5,97.3 114.4,97.3 115.3,97.3 112.6,98.1 113.5,98.1 114.4,98.1 115.3,98.1
ISOGND: C1_legA.2 C1_legB.2 C2_legA.2 C2_legB.2 C4_legA.2 C4_legB.2 C12.1 C19.1 J2.2 J2.4 J2.7 J2.8 J2.9 J2.10 R8.2 U1_legA.4 U1_legA.6 U1_legB.4 U1_legB.6 U3.9 U3.15 | length 6.1
  Top Layer w0.254: v1(103.79,69.05) 103.84,69 C2_legA.2 ; v1(103.85,107.987) 103.863,108 C2_legB.2 ; v1(103.872,67.767) 103.896,67.743 C1_legA.2 ; v1(103.928,103.034) 103.976,102.985 C4_legB.2 ; v1(103.937,63.853) 103.942,63.847 C4_legA.2 ; v1(103.938,106.71) 103.955,106.692 C1_legB.2 ; v1(105.3,77.692) 105.317,77.675 U3.15
LEGAH: J2.1
LEGAL: J2.3
NetC1_legA_1: C1_legA.1 U1_legA.2 | length 1.9
  Top Layer w0.254: C1_legA.1 105.449,67.699 107.242,67.699 U1_legA.2
NetC1_legB_1: C1_legB.1 U1_legB.2 | length 1.8
  Top Layer w0.254: C1_legB.1 105.41,106.713 107.128,106.713 U1_legB.2
NetC2_legA_1: C2_legA.1 U1_legA.1 | length 1.9
  Top Layer w0.254: C2_legA.1 105.428,68.962 107.249,68.962 U1_legA.1
NetC2_legB_1: C2_legB.1 U1_legB.1 | length 1.8
  Top Layer w0.254: C2_legB.1 105.392,108.002 107.146,108.002 U1_legB.1
NetC3_legA_1: C3_legA.1 R3_legA.1 U1_legA.14 | length 4.1
  Top Layer w0.254: U1_legA.14 115.176,68.925 C3_legA.1@115.212,68.889 ; R3_legA.1 115.212,70.312 C3_legA.1@115.212,68.889 ; C3_legA.1 C3_legA.1@115.212,68.889
NetC3_legA_2: C3_legA.2 FB1.1 Q1_legA.3 Q2_legA.2 R6.1 U1_legA.12 | length 20.8
  Top Layer w0.254: FB1.1 129.775,82.4 130.047,82.128 130.047,81.748 131.32,80.475 R6.1
  Top Layer w0.508: U1_legA.12 114.728,66.385 115.122,66.779 C3_legA.2
  Bottom Layer w0.508: 115.25,67 121,67 Q1_legA.3@126,62
  other v1: 115.009,64.971 115.729,65.05 115.009,65.671 115.809,65.671 130.5,71.962 131.721,71.976 132.971,71.976 130.5,72.962 131.721,72.976 132.971,72.976 130.521,74.074 131.742,74.088 132.992,74.088 130.521,75.074 131.742,75.088 132.992,75.088 130.521,76.074 131.742,76.088 132.992,76.088 130.521,77.074 131.742,77.088 132.992,77.088 130.521,78.074 131.742,78.088 132.992,78.088
NetC3_legB_1: C3_legB.1 R3_legB.1 U1_legB.14 | length 4
  Top Layer w0.254: R3_legB.1 114.95,107.873 C3_legB.1
  Top Layer w0.508: U1_legB.14 112.909,107.932 113.53,107.932 113.535,107.928 114.895,107.928 C3_legB.1@114.95,107.873
NetC3_legB_2: C3_legB.2 J4.2 Q1_legB.3 Q2_legB.2 U1_legB.12 | length 15.6
  Top Layer w0.254: C3_legB.2@114.902,105.463 C3_legB.2 C3_legB.2@115.504,106.065
  Top Layer w0.508: U1_legB.12 C3_legB.2@114.902,105.463
  Bottom Layer w0.508: 115.2,105.8 115.2,106.551 115.349,106.7 120.2,106.7 121.5,108 Q1_legB.3
  other v1: 114.8,103.8 115.6,103.8 114.8,104.5 115.6,104.5
NetC4_legA_1: C4_legA.1 U1_legA.5 | length 1.9
  Top Layer w0.254: C4_legA.1 105.391,63.846 U1_legA.5@107.285,63.846 ; U1_legA.5@107.285,63.846 U1_legA.5
NetC4_legB_1: C4_legB.1 U1_legB.5 | length 1.8
  Top Layer w0.254: C4_legB.1 105.421,102.954 107.117,102.954 U1_legB.5
NetC12_2: C12.2 J3.Shell R8.1
NetC13_1: C13.1 C14.1 C16.1 C17.2 C18.1 FB3.1 U3.2 U3.4 U3.8 | length 15.6
  Top Layer w0.254: U3.4 116.164,80.314 119.686,80.314 120,80 ; U3.8 116.131,85.361 123.732,85.361 FB3.1 ; 119.65,77.675 119.675,77.65
  Top Layer w0.508: U3.2@116.091,77.65 117.941,77.65 118.041,77.55 119.012,77.55 119.112,77.65 119.675,77.65
NetC13_2: C13.2 C16.2 C17.1 U3.1 U3.3 | length 9.2
  Top Layer w0.254: U3.1 U3.1@116.071,76.399 ; U3.3 116.108,78.988 v1(117.75,78.988) 118.522,78.988 ; C17.1@118.526,76.399 C17.1 ; C13.2 118.526,78.334 118.522,78.337 118.522,78.988 ; C16.2 118.522,79.638 118.522,78.988
  Top Layer w0.508: U3.1@116.071,76.399 C17.1@118.526,76.399
  Bottom Layer w0.254: v1(117.725,76.4) 117.75,76.425 v1(117.75,78.988)
NetC14_2: C14.2 C18.2 U3.5 | length 3.6
  Top Layer w0.254: U3.5 116.123,81.543 118.403,81.543 118.422,81.562 ; C18.2@118.415,82.221 118.422,82.214 118.422,81.562 ; C14.2@118.428,81.092 118.422,81.098 118.422,81.562 ; 118.46,81.6 118.422,81.562
NetC15_1: C15.1 R4.1 U3.6 | length 7.9
  Top Layer w0.254: U3.6 116.068,82.753 117.747,82.753 v1(117.75,82.75) ; v1(121.243,82.786) 121.839,82.786 122.225,82.4 R4.1
  Int1 (GND) w0.254: v1(117.75,82.75) v1@117.768,82.768 ; v1@121.224,82.768 v1(121.243,82.786)
  Bottom Layer w0.254: v1@117.768,82.768 v1@121.224,82.768
NetC15_2: C15.2 R5.1 U3.7 | length 7.9
  Top Layer w0.254: U3.7 116.078,84.013 117.737,84.013 v1(117.75,84) ; v1(121.25,84) 121.975,84 C15.2 122.225,83.9 R5.1
  Bottom Layer w0.254: v1(117.75,84) v1(121.25,84)
NetC19_2: C19.2 U3.13 U3.16 | length 8.4
  Top Layer w0.254: U3.16 106.907,76.378 104.643,76.378 C19.2 104.615,80.015 104.815,80.215 U3.13
NetD1_legA_1: D1_legA.1 R3_legA.2 | length 2.7
  Top Layer w0.254: R3_legA.2 117.217,70.533 D1_legA.1
NetD1_legB_1: D1_legB.1 R3_legB.2 | length 3.2
  Top Layer w0.254: R3_legB.2 117.478,109.5 117.627,109.351 117.627,108.873 D1_legB.1
NetF1_2: F1.2 J1.3
NetFB1_2: FB1.2 R4.2 | length 1.5
  Top Layer w0.254: R4.2 FB1.2
NetFB2_1: FB2.1 FB3.2 J4.1 R6.2 | length 12.4
  Top Layer w0.254: FB3.2@124.895,85.344 130.698,85.344 131.379,86.025 R6.2 R6.2@131.125,85.4 ; 127.34,83.9 129.9,83.9 130.05,84.05 130.05,84.752 R6.2@130.698,85.4
  other v1: 131.646,85.049 132.896,85.049 134.146,85.074 135.146,85.074 136.146,85.074 136.896,85.824 130.396,86.049 131.646,86.049 132.896,86.049 134.146,86.074 135.146,86.074 130.396,87.049 131.646,87.049 132.896,87.049 134.146,87.074 134.646,88.074
NetFB2_2: FB2.2 R5.2
NetJ3_4: J3.4 U3.11 | length 60.7
  Top Layer w0.254: J3.4 46.901,81.717 48.911,81.717 v1(48.934,81.693) ; v1(105.192,82.947) 105.239,82.9 106.789,82.9 U3.11
  Int1 (GND) w0.254: v1(48.934,81.693) 50.151,82.91 105.154,82.91 v1(105.192,82.947)
NetJ3_5: J3.5 U3.10 | length 60.7
  Top Layer w0.254: J3.5 46.889,82.771 48.903,82.771 v1(48.915,82.782) ; v1(105.15,83.835) 105.197,83.882 106.464,83.882 106.587,84.005 106.75,83.841 U3.10
  Int1 (GND) w0.254: v1(48.915,82.782) 49.55,83.418 104.733,83.418 v1(105.15,83.835)
NetQ1_legA_1: Q1_legA.1 R1_legA.2 | length 4.3
  Top Layer w0.508: R1_legA.2 122.642,72.035 122.642,72.579 123.063,73 125.88,73 Q1_legA.1@126,72.88
NetQ1_legB_1: Q1_legB.1 R1_legB.2 | length 4.9
  Top Layer w0.508: R1_legB.2 123.447,117.747 124.58,118.88 Q1_legB.1
NetQ2_legA_1: Q2_legA.1 R2_legA.2 | length 3.1
  Top Layer w0.254: Q2_legA.1@126.41,54.75 Q2_legA.1
  Top Layer w0.508: R2_legA.2 Q2_legA.1@126.41,54.75
NetQ2_legB_1: Q2_legB.1 R2_legB.2 | length 4.7
  Top Layer w0.254: R2_legB.2 125.62,100.5 Q2_legB.1
NetR1_legA_1: R1_legA.1 U1_legA.13 | length 11.1
  Top Layer w0.381: U1_legA.13 113.066,67.744 120.494,67.744
  Top Layer w0.508: 120.494,67.744 122.5,69.75 R1_legA.1@122.5,70.5
NetR1_legB_1: R1_legB.1 U1_legB.13 | length 17.2
  Top Layer w0.254: U1_legB.13 112.939,106.633 117.328,106.633 117.342,106.619 119.658,106.619 119.672,106.633 120.133,106.633
  Top Layer w0.508: 120.133,106.633 123.447,109.947 R1_legB.1
NetR2_legA_1: R2_legA.1 U1_legA.10 | length 12.8
  Top Layer w0.381: U1_legA.10 113.05,61.231 117.269,61.231
  Top Layer w0.508: 117.269,61.231 122.1,56.4 R2_legA.1
NetR2_legB_1: R2_legB.1 U1_legB.10 | length 8.1
  Top Layer w0.254: U1_legB.10 120.733,100.383 R2_legB.1
NetR7_2: R7.2 U3.14 | length 3.9
  Top Layer w0.254: R7.2 v1(103.825,78.95) ; v1(105.246,78.95) 105.248,78.947 106.932,78.947 U3.14
  Int1 (GND) w0.254: v1(103.825,78.95) v1(105.246,78.95)
VDD_3V3: J2.5 R7.1 U1_legA.3 U1_legA.8 U1_legB.3 U1_legB.8 U3.12 | length 6.7
  Top Layer w0.254: v1(101.158,78.965) 101.173,78.95 R7.1 ; v1(105.19,81.51) 105.215,81.485 U3.12 ; v1(106.048,105.46) 106.051,105.463 U1_legB.3 ; v1(106.125,99.117) 106.128,99.113 U1_legB.8 ; v1(106.205,60.019) 107.271,60.019 U1_legA.8 ; v1(106.268,66.385) U1_legA.3
  other v1: 43.75,54.5 44.75,54.5 39.75,55.5 40.75,55.5 41.75,55.5 42.75,55.5 43.75,55.5 44.75,55.5
pads on no net: J3.1 J3.2 J3.3 J3.6 J3.7 J3.8 J3.M1 J3.M2 U1_legA.7 U1_legB.7
copper on no net: | length 1.5
  Top Layer w0.254: 124.975,83.9 126.46,83.9

## Polygon pours and split planes (outlines as drawn)
NetC3_legA_2 on Top Layer "NETC3_LEGA_2_L01_P031" (solid, pour order 31): 130.684,71.5 132.733,71.5 ccw(c132.733,72.267) 133.5,72.267 133.5,80 130,80 130,72.184 ccw(c130.684,72.184)
12V on Top Layer "12V_L01_P029" (solid, pour order 29): 115.5,62.7 ccw(c115.5,64.7) 117.5,64.7 119.5,64.7 119.4,64.6 119.4,63.5 cw(c117.5,63.5) 117.5,61.6 115.5,61.6
12V on Top Layer "12V_L01_P028" (solid, pour order 28): 115.7,101.8 116.2,101.8 ccw(c116.2,103.1) 117.5,103.1 119.463,103.1 cw(c117.263,103.1) 117.263,100.9 115.7,100.9
ISOGND on Top Layer "NONET_L-01_P-001" (solid, pour order 7): 30,92 89.5,92 ccw(c89.5,103.5) 101,103.5 101,109 108.75,109 108.75,41.925 30,41.925
VDD_3V3 on Top Layer "VDD_3V3_L01_P001" (solid, pour order 1): 39,53.75 39,56.25 45.25,56.25 45.25,53.75
200V on Top Layer "200V_L01_P026" (solid, pour order 26): 57,106 68.5,106 68.5,115.5 74.5,115.5 74.5,99 57,99
NetF1_2 on Top Layer "NETF1_2_L01_P024" (solid, pour order 24): 62,122.5 62,117.5 40.258,117.5 40.258,122.5
GND on Top Layer "NONET_L-01_P-001" (solid, pour order 15): 126.528,45.146 ccw(c125.387,50.781) 131.137,50.781 131.137,56.031 143.137,56.031 143.137,53.031 cw(c141.639,53.031) 141.638,51.532 140.144,51.533 ccw(c140.139,45.031) 133.637,45.031 133.637,44.031 cw(c132.388,44.031) 132.387,42.781 126.357,42.781 cw(c126.357,43.751) 125.387,43.751 cw(c126.81,43.751)
NetC13_1 on Top Layer "NETC13_1_L01_P023" (solid, pour order 23): 120.5,85.5 120.5,77.75 121,77.75 121,76 119,76 119,77.75 119,85.5
NetFB2_1 on Top Layer "NETFB2_2_L01_P022" (solid, pour order 22): 136.75,88.75 135,88.75 ccw(c135,88) 134.25,88 cw(c134,88) 134,87.75 130.432,87.75 ccw(c130.432,87.068) 129.75,87.068 129.75,84.5 136.5,84.5 ccw(c136.5,85.5) 137.5,85.5 137.5,88 ccw(c136.75,88)
200V on Top Layer "NONET_L-01_P-001" (solid, pour order 16): 131.368,63.681 131.368,60.181 142.932,60.181 142.893,65.413 ccw(c139.349,65.387) 139.349,68.931 126.667,68.931 ccw(c126.667,67.382) 125.118,67.382 ccw(c126.319,67.382) 126.319,66.181 128.868,66.181 cw(c128.868,63.681)
GND on Top Layer "NONET_L-01_P-001" (solid, pour order 4): 126.492,91.836 ccw(c125.5,97.5) 131.25,97.5 131.25,102.75 143.25,102.75 143.25,99.749 cw(c141.752,99.749) 141.751,98.251 140.257,98.252 ccw(c140.252,91.75) 133.75,91.75 133.75,90.75 cw(c132.5,90.75) 132.5,89.5 126,89.5 cw(c126,90) 125.5,90 125.5,90.655 cw(c126.7,90.655)
GND on Top Layer "NONET_L-01_P-001" (solid, pour order 14): 112.4,60.3 114.2,60.3 114.2,60.7 116.2,60.7 116.2,57.8 112.4,57.8
GND on Top Layer "NONET_L-01_P-001" (solid, pour order 11): 112.2,99.4 114,99.4 114,99.8 116,99.8 116,96.9 112.2,96.9
NetC3_legA_2 on Top Layer "NONET_L-01_P-001" (solid, pour order 10): 114.608,67.271 116.208,67.271 116.208,64.958 cw(c115.821,64.958) 115.821,64.571 114.929,64.571 cw(c114.929,64.892) 114.608,64.892
NetC3_legB_2 on Top Layer "NONET_L-01_P-001" (solid, pour order 9): 114.402,106.101 116,106.101 116,103.401 114.402,103.401
200V on Top Layer "NONET_L-01_P-001" (solid, pour order 5): 131.5,109.75 131.5,106.25 143.064,106.25 143.026,111.482 ccw(c139.482,111.456) 139.482,115 125.25,115 125.25,112.25 129,112.25 cw(c129,109.75)
NetC12_2 on Top Layer "NONET_L-01_P-001" (solid, pour order 2): 34.949,75.25 38.834,75.25 38.834,73.25 34.949,73.25
NetC3_legB_2 on Int1 (GND) "NETC3_LEGB_2_L02_P021" (solid, pour order 21): 126.507,97.007 128.5,97.007 128.5,104.007 ccw(c125.507,104.007) 126.04,106.952 cw(c126.155,107.59) 125.507,107.59 125.507,108.507 cw(c126.5,108.507) 126.5,109.5 cw(c126.5,105) 131,105 131,98 ccw(c131.993,98) 131.993,97.007 132.507,97.007 cw(c132.508,92.008) 137.507,92.007 cw(c136.507,92.007) 136.507,91.007 136.007,91.007 cw(c136.007,92.007) 135.007,92.007 ccw(c132.507,92.007) 132.507,94.507 127.007,94.507 cw(c127.007,96.007) 125.507,96.007 cw(c126.507,96.007)
12V on Int1 (GND) "12V_L02_P027" (solid, pour order 27): 40,112 40,124 123,124 123,56 114,56 114,106 ccw(c108,106) 108,112
VDD_3V3 on Int1 (GND) "NONET_L-01_P-001" (solid, pour order 25): 32.684,92 89.509,92 ccw(c89.509,103.5) 101.009,103.5 101.009,109 108.759,109 108.759,41.925 32.684,41.925
NetC3_legA_2 on Int1 (GND) "NETC3_LEGA_2_L02_P019" (solid, pour order 19): 130,81.75 130,63 126.5,63 ccw(c126.5,62) 125.5,62 ccw(c126.5,62) 126.5,61 130,61 130,50.75 126.75,50.75 ccw(c126.75,49.5) 125.5,49.5 ccw(c126.75,49.5) 126.75,48.25 129.75,48.25 ccw(c129.75,52) 133.5,52 133.5,81.75
NetC3_legA_2 on Bottom Layer "NONET_L-01_P-001" (solid, pour order 8): 114.609,67.271 116.209,67.271 116.209,64.571 114.609,64.571
NetC3_legB_2 on Bottom Layer "NONET_L-01_P-001" (solid, pour order 6): 114.4,106.1 116,106.1 116,103.4 114.4,103.4
GND on Bottom Layer "NONET_L-01_P-001" (solid, pour order 0): 30,125 122.5,125 122.256,93.25 ccw(c123.721,93.239) 123.721,91.773 126.727,91.773 cw(c126.727,90.5) 128,90.5 128,89.5 cw(c126.5,89.5) 126.5,88 123.497,88 ccw(c123.497,86.759) 122.257,86.753 122.457,49.967 ccw(c127.25,49.993) 125.799,45.425 cw(c125.558,43.75) 127.25,43.75 cw(c126.3,43.75) 126.3,42.8 122.5,42.8 122.5,30 30,30
NetC3_legB_2 on Bottom Layer "NETC3_LEGB_2_L04_P020" (solid, pour order 20): 126.5,97 132.5,97 cw(c132.5,92) 137.5,92 cw(c136.5,92) 136.5,91 136,91 cw(c136,92) 135,92 ccw(c132.5,92) 132.5,94.5 127,94.5 cw(c127,96) 125.5,96 cw(c126.5,96)
NetC3_legA_2 on Bottom Layer "NETC3_LEGA_2_L04_P018" (solid, pour order 18): 130,81.75 130,63 126.5,63 ccw(c126.5,62) 125.5,62 ccw(c126.5,62) 126.5,61 130,61 130,52.175 cw(c128.575,52.175) 128.575,50.75 126.75,50.75 ccw(c126.75,49.5) 125.5,49.5 ccw(c126.75,49.5) 126.75,48.25 130.05,48.25 ccw(c130.05,51.7) 133.5,51.7 133.5,81.75
NetFB2_1 on Bottom Layer "NETFB2_2_L04_P017" (solid, pour order 17): 136.748,88.752 134.998,88.752 ccw(c134.998,88.002) 134.248,88.002 cw(c133.998,88.002) 133.998,87.752 130.43,87.752 ccw(c130.43,87.07) 129.748,87.07 129.748,84.502 136.498,84.502 ccw(c136.498,85.502) 137.498,85.502 137.498,88.002 ccw(c136.748,88.002)
NetC3_legB_2 on Int2 (PWR) "NETC3_LEGB_2_L03_P030" (solid, pour order 30): 126.507,97 128.5,97 128.5,104 ccw(c125.507,104) 126.04,106.945 cw(c126.155,107.583) 125.507,107.583 125.507,108.5 cw(c126.5,108.5) 126.5,109.493 cw(c126.5,104.993) 131,104.993 131,97.993 ccw(c131.993,97.993) 131.993,97 132.507,97 cw(c132.507,92) 137.507,92 cw(c136.507,92) 136.507,91 136.007,91 cw(c136.007,92) 135.007,92 ccw(c132.507,92) 132.507,94.5 127.007,94.5 cw(c127.007,96) 125.507,96 cw(c126.507,96)
200V on Int2 (PWR) "NONET_L-01_P-001" (solid, pour order 3): 29.989,125.011 121.989,125.011 121.989,115.011 127.989,115.011 127.989,112.011 121.989,112.011 121.989,69.011 127.589,69.011 127.601,66 121.989,66 121.989,30.011 29.989,30.011

## Silkscreen, mask and mechanical layers (free items; w line width, h text height)
Top Overlay:
  drawing of 30 lines, arcs and shapes, not listed
  text "400V" at 44.373,117.894 h1.52
  text "12V" at 44.496,112.394 h1.52
  text "GND" at 44.496,107.144 h1.52
  text "Fuse 2.5A 400V" at 67.356,107.123 h1.52 r90
  text "I-" at 138.687,96.394 h1.52
  text "ISENSE" at 39.996,91.894 h1.52
  text "I+" at 138.687,81.394 h1.52
  text "3V3" at 56.504,53.699 h1.52
  text "DIS" at 49.046,53.671 h1.52
  text "ISOGND" at 56.504,51.198 h1.52
  text "ISOGND" at 49.046,51.171 h1.52
  text "LEGAL" at 56.504,48.448 h1.52
  text "ISOGND" at 49.046,48.421 h1.52
  text "JECB Power v1.0" at 70.248,46.894 h1.52
  text "ISOGND" at 56.5,46 h1.52
  text "ISOGND" at 49.043,45.973 h1.52
  text "ISOGND" at 49.043,43.528 h1.52
  text "LEGAH" at 56.545,43.512 h1.52